# Altium PCB circuit_2.PcbDoc
Units mil, origin at the board's own origin, x right, y up, seen from the top; angles counter-clockwise.
Board outline 1100 x 785 mil, 2 copper layers (Top Layer, Bottom Layer); 7 components, 11 nets, 26 pads, 0 vias.
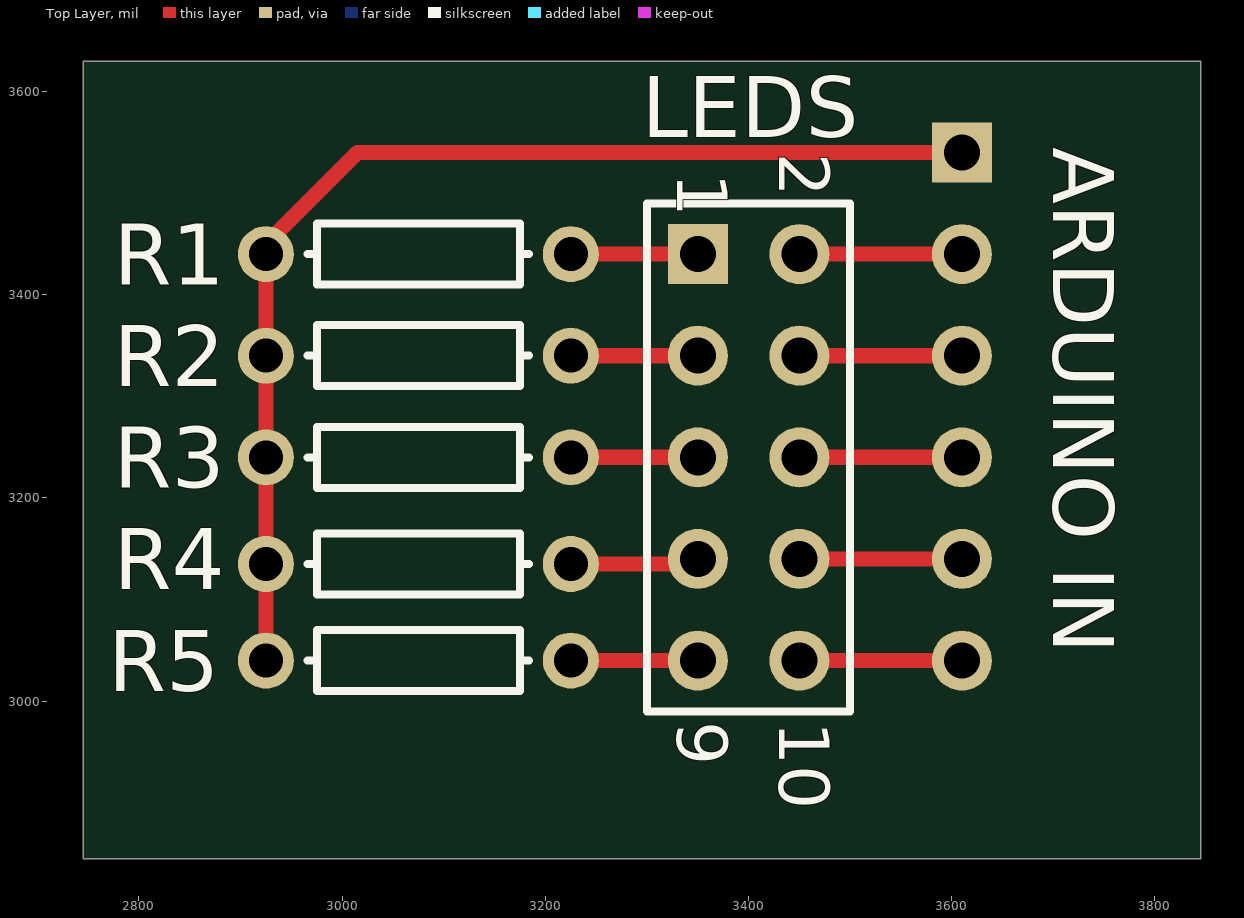
[diagram p0: Top Layer view]
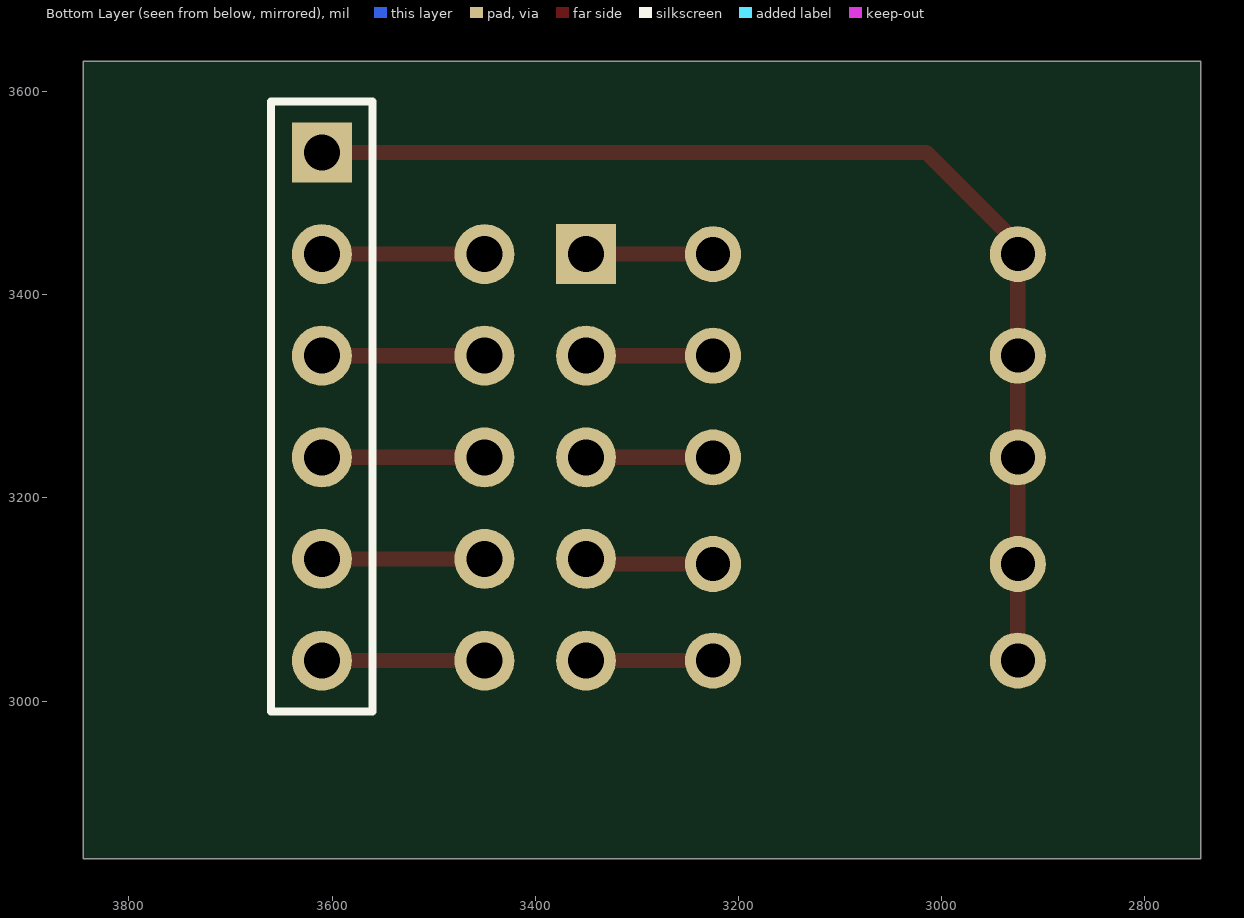
[diagram p1: Bottom Layer view, seen from below]

## Layer stack, top to bottom
Top Solder: solder mask 0.4, Solder Resist, Dk 3.5
Top Layer: signal copper 1.4
Dielectric 1: dielectric 12.6, FR-4, Dk 4.8
Bottom Layer: signal copper 1.4
Bottom Solder: solder mask 0.4, Solder Resist, Dk 3.5

## Board outline
2745,2845 2745,3630 3845,3630 3845,2845

## Design rules (kind name [scope] priority, off if disabled: settings)
Clearance [All] p1: gap=10 ignorepadtopadclearanceinfootprint=FALSE except(0: Arc-Hole Track-Hole SMDPad-Hole THPad-Hole Via-Hole Fill-Hole Poly-Hole Region-Hole Text-Hole)
PolygonConnect [All] p1: connectstyle=Relief reliefconductorwidth=10 reliefentries=4 polygonreliefangle="90 Angle" airgapwidth=10
RoomDefinition circuit_2 [InComponentClass('circuit_2')] p1: confinementstyle=ConfineIn formatcopy=TRUE lockcomponents=FALSE outline 0,0 2000,0 2000,1000 0,1000
RoutingVias [All] p1: holewidth=28 width=50 viastyle="Through Hole" minholewidth=28 minwidth=50 maxholewidth=28 maxwidth=50
SolderMaskExpansion [All] p1: expansion=4
Width [All] p1: maxlimit=15 minlimit=10 preferedwidth=15
30 further rules are at their usual default settings.

## Components (designator, comment, footprint, x,y, rotation, side; value= is the part's Value field where it differs from the comment)
"ARDUINO IN" "Header 6" HDR1X6 3610,3540 r270 top
LEDS "Header 5X2" HDR2X5 3350,3440 r270 top
R1 "Res1" AXIAL-0.3 3075,3440 r180 top value=220
R2 "Res1" AXIAL-0.3 3075,3340 r0 top value=10K
R3 "Res1" AXIAL-0.3 3075,3240 r0 top value=10K
R4 "Res1" AXIAL-0.3 3075,3135 r0 top value=10K
R5 "Res1" AXIAL-0.3 3075,3040 r0 top value=10K

## Footprints (in the part's own frame and the unit in brackets; to place one, negate y for a bottom-side part, rotate by r counter-clockwise, add the part's x,y. Pads: shape width x height; smd on the part's side, far side on the other; paste and mask are expansions set on the pad)
AXIAL-0.3 [mm] "Axial Device, Thru-Hole; 2 Leads; 0.3 in Pin Spacing"
  round 1.4 hole 0.85: 1(-3.81,0) 2(3.81,0)
  silkscreen extent -2.77,-0.76 2.77,0.76
HDR1X6 [mm] "Connector; Header; 6 Position"
  rect 1.5x1.5 hole 0.9: 1(0,0)
  round 1.5 hole 0.9: 2(2.54,0) 3(5.08,0) 4(7.62,0) 5(10.16,0) 6(12.7,0)
HDR2X5 [mm] "Connector; Header; 5x2 Position"
  rect 1.5x1.5 hole 0.9: 1(0,0)
  round 1.5 hole 0.9: 2(0,2.54) 3(2.54,0) 4(2.54,2.54) 5(5.08,0) 6(5.08,2.54) 7(7.62,0) 8(7.62,2.54) 9(10.16,0) 10(10.16,2.54)
  silkscreen extent -1.27,-1.27 11.43,3.81

## Part data
"ARDUINO IN": "Header, 6-Pin", LatestRevisionDate=17-Jul-2002, LatestRevisionNote="Re-released for DXP Platform.", Publisher="Altium Limited"
LEDS: "Header, 5-Pin, Dual row", LatestRevisionDate=17-Jul-2002, LatestRevisionNote="Re-released for DXP Platform.", Publisher="Altium Limited"
R1 R2 R3 R4 R5: "Resistor", LatestRevisionDate=17-Jul-2002, LatestRevisionNote="Re-released for DXP Platform.", PackageDescription="Axial Device, Thru-Hole; 2 Leads; 0.3 in Pin Spacing", PackageReference=AXIAL-0.3, Published=8-Jun-2000, Publisher="Altium Limited"

## Nets (pads, with @x,y where several pads share a name; then routed paths per layer and width w, separated by ;. In a path a pad name is that pad's centre, name@x,y a point inside that pad or via, vN(x,y) a via of type N, cw(c..) or ccw(c..) an arc to the next point about the centre after c; other vN are vias at no path point)
"NetARDUINO IN_1": "ARDUINO IN.1" R1.2 R2.1 R3.1 R4.1 R5.1 | length 1146.4
  Top Layer w10: R3.1@2920,3235 2915,3240 R3.1@2920,3245
  Top Layer w15: R5.1 R4.1 R3.1 R2.1 R1.2 2925,3450 3015,3540 3610,3540
"NetARDUINO IN_2": "ARDUINO IN.2" LEDS.2 | length 160
  Top Layer w15: LEDS.2 3610,3440
"NetARDUINO IN_3": "ARDUINO IN.3" LEDS.4 | length 160
  Top Layer w15: LEDS.4 3610,3340
"NetARDUINO IN_4": "ARDUINO IN.4" LEDS.6 | length 160
  Top Layer w15: LEDS.6 3610,3240
"NetARDUINO IN_5": "ARDUINO IN.5" LEDS.8 | length 160
  Top Layer w15: LEDS.8 3610,3140
"NetARDUINO IN_6": "ARDUINO IN.6" LEDS.10 | length 160
  Top Layer w15: LEDS.10 3610,3040
NetLEDS_1: LEDS.1 R1.1 | length 125
  Top Layer w15: R1.1 LEDS.1
NetLEDS_3: LEDS.3 R2.2 | length 130
  Top Layer w10: R2.2@3220,3340 R2.2
  Top Layer w15: R2.2 LEDS.3
NetLEDS_5: LEDS.5 R3.2 | length 135
  Top Layer w10: R3.2@3215,3240 R3.2
  Top Layer w15: R3.2 LEDS.5
NetLEDS_7: LEDS.7 R4.2 | length 134.1
  Top Layer w10: R4.2 R4.2@3230,3140
  Top Layer w15: R4.2 3345,3135 LEDS.7
NetLEDS_9: LEDS.9 R5.2 | length 130
  Top Layer w10: R5.2@3220,3040 R5.2
  Top Layer w15: R5.2 LEDS.9

## Silkscreen, mask and mechanical layers (free items; w line width, h text height)
Mechanical 1:
  the board outline again, w10

## Text inside footprints (layer, text, board x,y; h text height)
LEDS: Top Overlay "2" at 3430,3540 h50 r270; Top Overlay "1" at 3330,3520 h50 r270; Top Overlay "9" at 3330,2980 h50 r270; Top Overlay "10" at 3430,2980 h50 r270